# EAGLE board Review_PCD_1.3 (EAGLE 9.6.2)
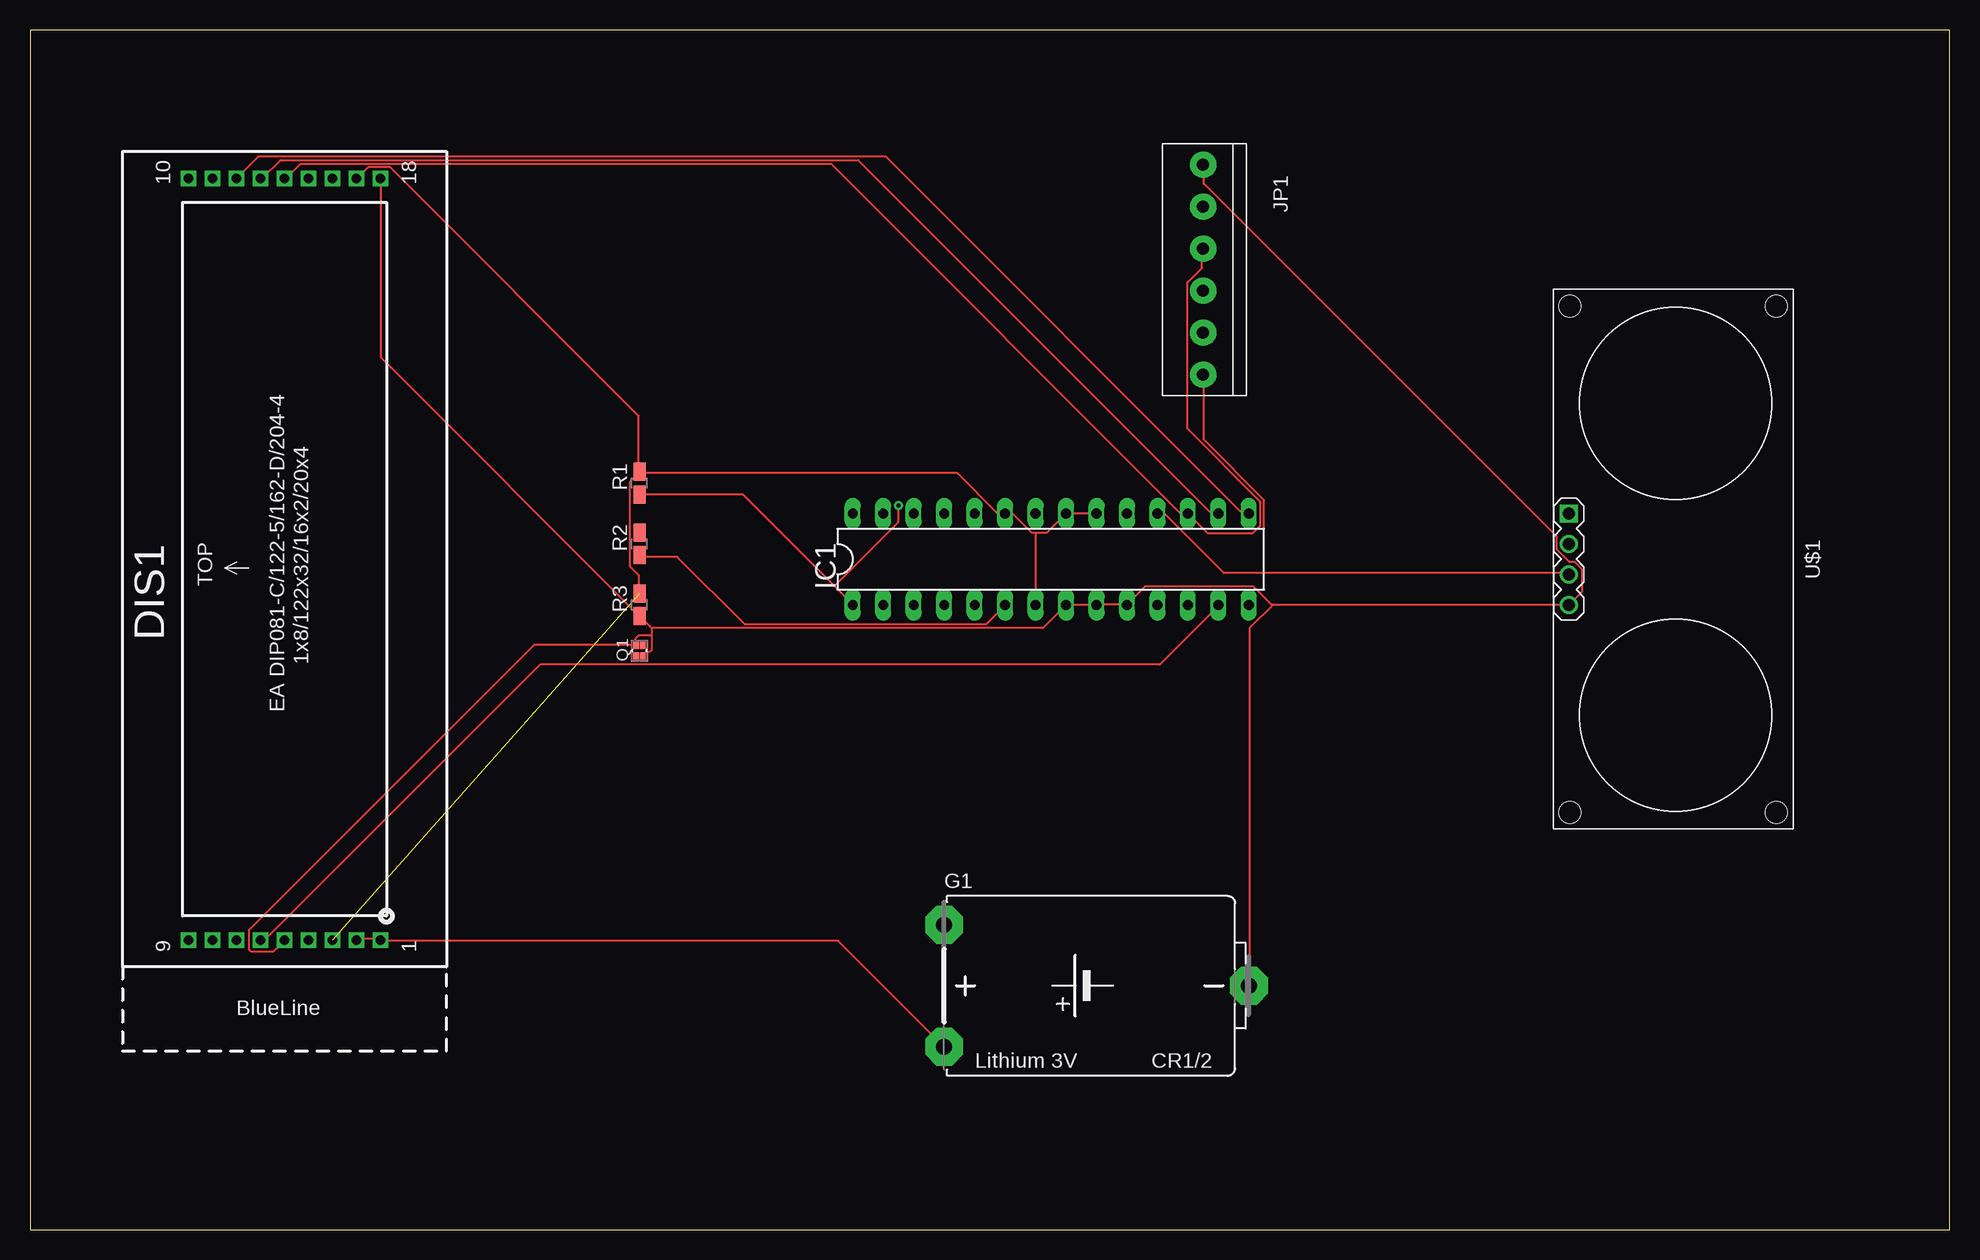
[diagram p0: board, top side]
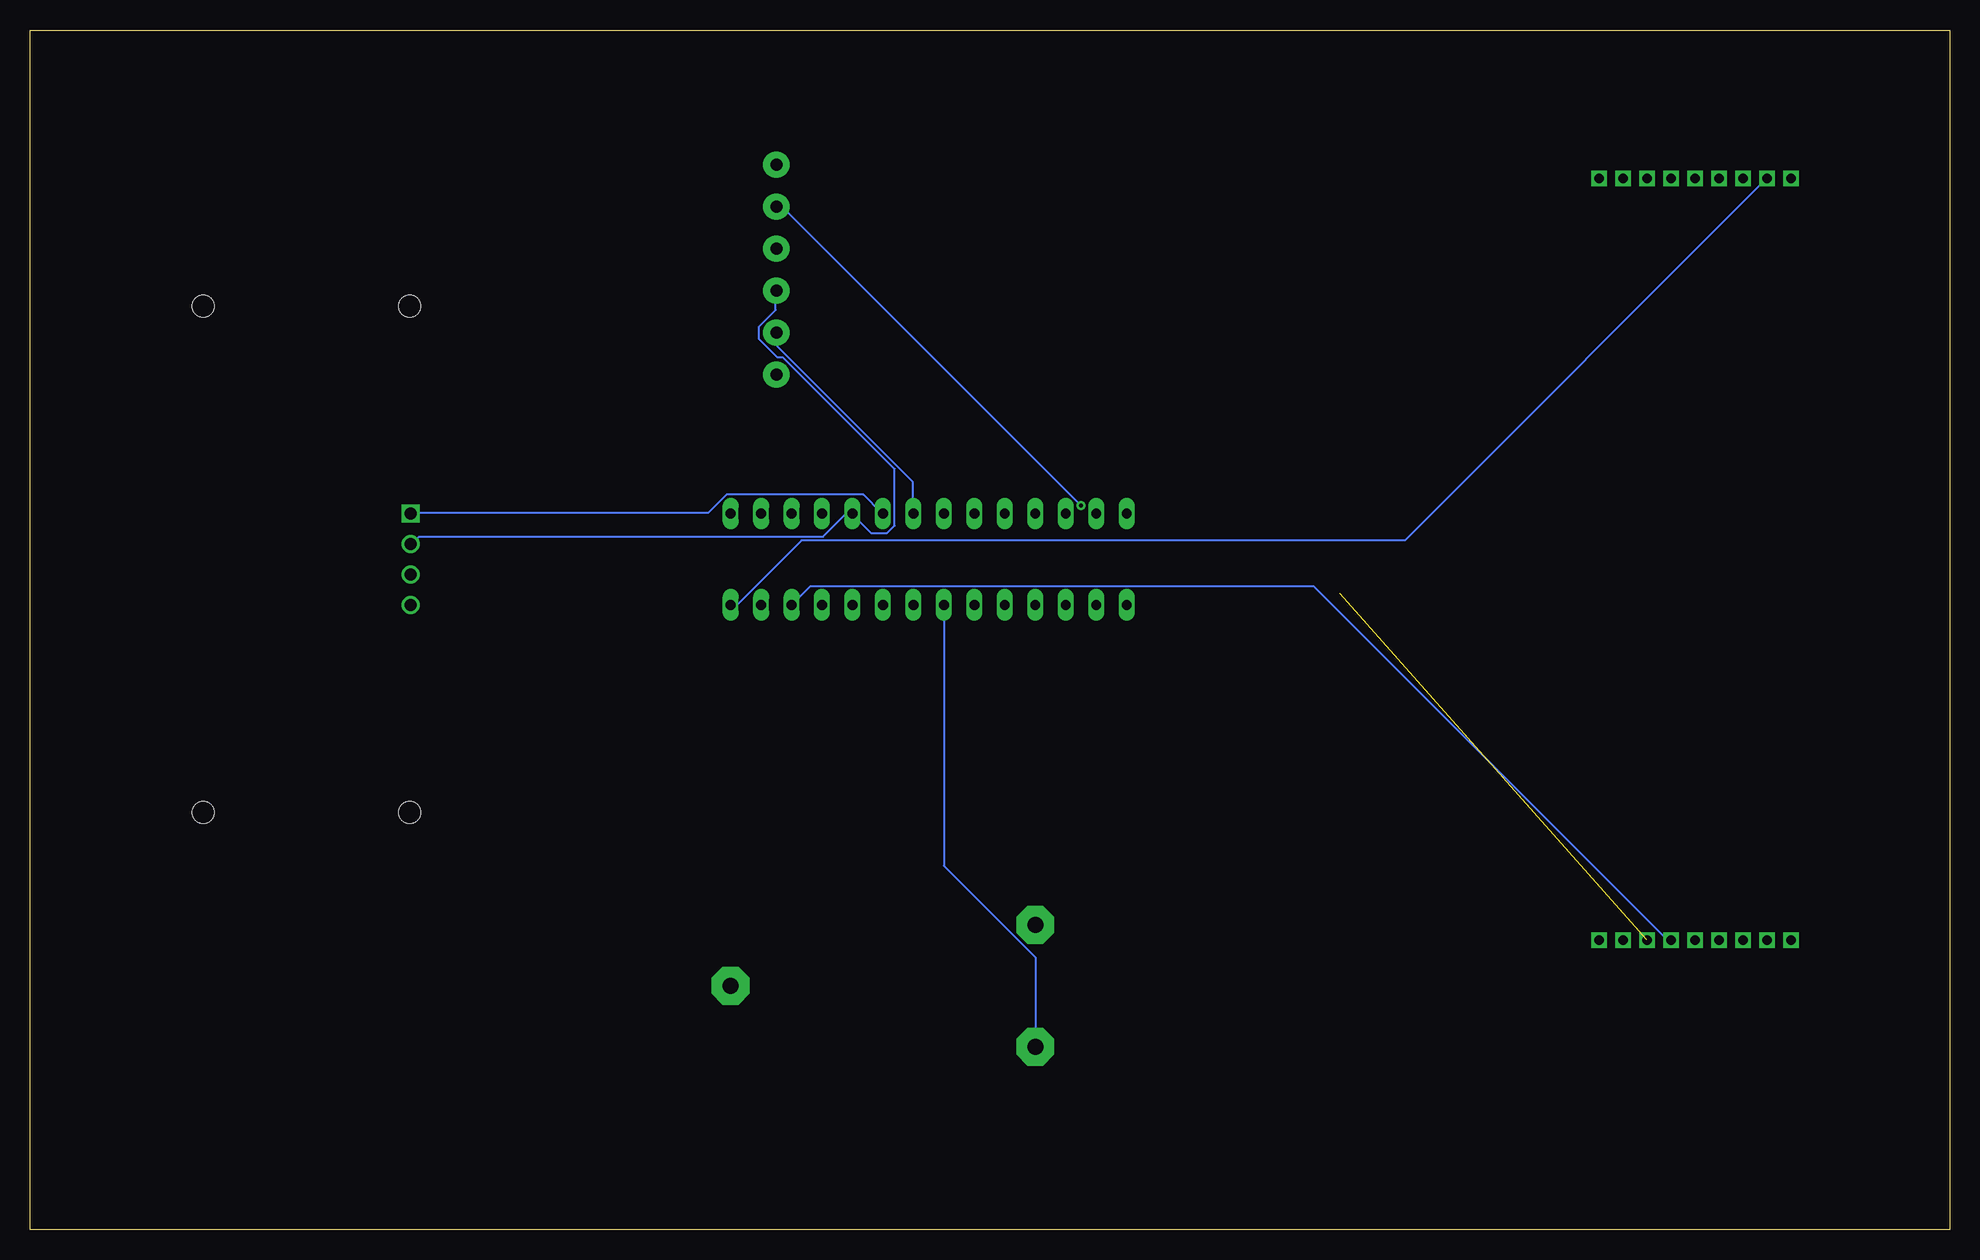
[diagram p1: board, bottom side, seen from below]

Size 160 x 100 mm. Coordinates in mm from the lower left corner, seen from the top.
Outline: 0,0 160,0 160,100 0,100 0,0
Copper layers (1*16): Top 0.035mm / dielectric 0.15mm / Bottom 0.035mm
Design rules "default": minimum track width 6mil, minimum drill 0.35mm, track to track 6mil, track to pad 6mil, pad to pad 6mil, via to via 6mil, smd to smd 6mil, copper to edge 40mil, drill to drill 6mil, minimum pad ring 10mil, minimum via ring 8mil, stop-mask expansion 4mil, vias tented up to drill 0mil, thermal gap 10mil

## Footprints (pad centres in the part's own frame; a part is rotated, then mirrored left to right if it is on the bottom)
EA_DIP = drill 0.813 pad 1.27 square: 1 0,0; 2 0,2; 3 0,4; 4 0,6; 5 0,8; 6 0,10; 7 0,12; 8 0,14; 9 0,16; 10 63.5,16; 11 63.5,14; 12 63.5,12; 13 63.5,10; 14 63.5,8; 15 63.5,6; 16 63.5,4; 17 63.5,2; 18 63.5,0
CR1/2 = drill 1.321 pad 3.15 octagon: + -12.7,-5.08; +@1 -12.7,5.08; - 12.7,0
DIL28-3 = drill 0.813 long: 1 -16.51,-3.81; 2 -13.97,-3.81; 3 -11.43,-3.81; 4 -8.89,-3.81; 5 -6.35,-3.81; 6 -3.81,-3.81; 7 -1.27,-3.81; 8 1.27,-3.81; 9 3.81,-3.81; 10 6.35,-3.81; 11 8.89,-3.81; 12 11.43,-3.81; 13 13.97,-3.81; 14 16.51,-3.81; 15 16.51,3.81; 16 13.97,3.81; 17 11.43,3.81; 18 8.89,3.81; 19 6.35,3.81; 20 3.81,3.81; 21 1.27,3.81; 22 -1.27,3.81; 23 -3.81,3.81; 24 -6.35,3.81; 25 -8.89,3.81; 26 -11.43,3.81; 27 -13.97,3.81; 28 -16.51,3.81
1X06-3.5MM = drill 1 pad 2.184: 1 -8.75,0; 2 -5.25,0; 3 -1.75,0; 4 1.75,0; 5 5.25,0; 6 8.75,0
1.6X1.2 = smd 0.75 x 0.65: 1 -0.525,-0.375; 2 0.525,-0.375; 3 0.525,0.375; 4 -0.525,0.375
R2012W = smd 1.5 x 1: 1 -0.94,0; 2 0.94,0
ULTRASONIC-HC-SR04 = drill 1 square: 1 -3.81,-8.89 | drill 1: 2 -1.27,-8.89; 3 1.27,-8.89; 4 3.81,-8.89 | hole 1.8: -21.1,8.4; -21.1,-8.8; 21.1,-8.8; 21.1,8.4

## Placement (x,y rotation side)
DIS1  EA_DIP  [EA_DIP]  29.21,24.13 90 top
G1  CR1/2  [CR1/2]  88.9,20.32 0 top
IC1  ATMEGA168-20P  [DIL28-3]  85.09,55.88 0 top
JP1  [1X06-3.5MM]  97.79,80.01 90 top
Q1  [1.6X1.2]  50.8,48.26 90 top
R1  [R2012W]  50.8,62.23 90 top
R2  [R2012W]  50.8,57.15 90 top
R3  [R2012W]  50.8,52.07 90 top
U$1  ULTRASONIC-HC-SR04  [ULTRASONIC-HC-SR04]  137.16,55.88 270 top

## Library data of the parts
DIS1 = display-lcd
G1 = battery
IC1 JP1 = adafruit
Q1 = crystal-geyer_V1_0; Q1: 16 MHz
R1 R3 = adafruit; R1: 10 kOhm
R2 = adafruit; R1: 1 kOhm
U$1 = diy-modules

## Nets
0: DIS1.5 DIS1.18 G1.- IC1.8 IC1.9 IC1.10 JP1.6 Q1.1 Q1.3 R3.1 U$1.4
N$1: DIS1.1 DIS1.2 DIS1.17 G1.+ IC1.7 IC1.20 IC1.21 IC1.23 JP1.2 R1.2 U$1.1
N$2: IC1.1 JP1.5 R1.1
N$3: IC1.6 R2.1
N$4: R2.2
N$5: DIS1.4 IC1.12
N$6: DIS1.6 IC1.13
N$7: DIS1.11 IC1.14
N$8: DIS1.12 IC1.15
N$9: DIS1.13 IC1.16
N$11: DIS1.3 R3.2
N$13: IC1.18 JP1.1 U$1.3
N$14: IC1.19 JP1.3 U$1.2
N$15: DIS1.14 IC1.17 JP1.4

## Tracks (layer width: path | path; a pad name or v marks a point on that pad's centre or on a via)
0
  Top 0.152: 91.44,52.12 89,52.12 IC1.9 88.85,52.12 86.41,52.12 IC1.8 84.43,50.14 51.82,50.14 | 103.63,52.12 103.48,52.12 101.96,53.65 92.96,53.65 91.44,52.12 | 103.63,52.12 128.17,52.12 U$1.4 129.39,53.19 129.39,55.02 128.78,55.63 128.32,55.63 127.25,56.69 127.25,57.76 97.84,87.17 97.84,88.7 JP1.6 | 91.44,52.12 IC1.10 | 103.63,52.12 101.65,50.14 101.65,20.42 G1.- | 51.82,50.14 51.82,49.53 | 51.82,49.53 51.82,48.31 51.66,48.16 51.51,48.16 51.21,47.85 Q1.1 | 51.82,50.14 50.9,51.05 R3.1 50.75,51.21 29.26,72.69 29.26,87.63 DIS1.18 | 51.82,49.53 50.75,49.53 50.44,49.23 50.44,48.92 Q1.3 50.29,48.77 42.06,48.77 18.29,24.99 18.29,23.32 18.44,23.16 20.27,23.16 21.18,24.08 DIS1.5
N$1
  Top 0.152: DIS1.2 27.28,24.23 29.11,24.23 DIS1.1 29.26,24.08 67.36,24.08 G1.+ | 83.82,58.06 84.73,58.06 IC1.21 86.41,59.74 88.85,59.74 IC1.20 | 83.82,58.06 83.52,58.06 81.99,59.59 81.38,59.59 IC1.23 81.23,59.74 80.62,59.74 77.27,63.09 50.9,63.09 R1.2 | 83.82,58.06 IC1.7 | 50.75,53.03 50.75,54.56 49.99,55.32 49.99,62.33 50.75,63.09 R1.2 | DIS1.17 27.28,87.63 28.19,88.54 30.02,88.54 50.75,67.82 50.75,63.25 R1.2
  Bottom 0.152: U$1.1 128.17,59.74 103.48,59.74 101.96,61.27 90.53,61.27 89,59.74 IC1.20 | G1.+ 76.2,22.71 83.82,30.33 IC1.7 | JP1.2 97.69,74.68 97.69,73.61 86.41,62.33 86.41,59.74 IC1.21
N$2  (via drill 0.35)
  Top 0.152: 67.06,53.65 68.58,52.12 IC1.1 | 67.06,53.65 59.44,61.27 50.9,61.27 R1.1 | v72.39,60.35 72.39,58.98 67.06,53.65
  Bottom 0.152: v72.39,60.35 97.23,85.19 97.69,85.19 JP1.5
N$3
  Top 0.152: R2.1 50.9,56.08 53.95,56.08 59.59,50.44 79.7,50.44 81.23,51.97 IC1.6
N$5
  Bottom 0.152: IC1.12 94.94,53.65 53.03,53.65 23.62,24.23 23.32,24.23 DIS1.4
N$6
  Top 0.152: DIS1.6 19.36,24.23 19.66,24.23 42.52,47.09 94.18,47.09 99.06,51.97 IC1.13
N$7
  Bottom 0.152: IC1.14 101.5,52.12 101.04,52.12 95.71,57.45 45.41,57.45 15.24,87.63 DIS1.11
N$8
  Top 0.152: IC1.15 101.5,59.74 101.04,59.74 71.32,89.46 19.05,89.46 DIS1.12
N$9
  Top 0.152: IC1.16 99.06,59.74 98.45,59.74 69.04,89.15 20.88,89.15 19.36,87.63 DIS1.13
N$11  (1 unrouted)
N$13
  Top 0.152: 102.87,54.71 128.17,54.71 U$1.3 | 102.87,54.71 99.52,54.71 94.64,59.59 94.03,59.59 IC1.18 | 102.87,54.71 102.87,60.81 97.84,65.84 97.84,71.17 JP1.1
N$14
  Bottom 0.152: 91.44,59.59 92.05,59.59 93.88,57.76 127.56,57.76 128.17,57.15 U$1.2 | 91.44,59.59 89.92,58.06 88.54,58.06 87.94,58.67 87.94,63.4 97.23,72.69 97.69,72.69 99.21,74.22 99.21,75.29 97.84,76.66 97.84,78.18 JP1.3 | 91.44,59.59 IC1.19
N$15
  Top 0.152: DIS1.14 21.34,87.63 22.55,88.85 66.75,88.85 95.86,59.74 96.47,59.74 IC1.17 98.15,58.06 101.96,58.06 102.56,58.67 102.56,60.66 96.47,66.75 96.47,78.94 97.69,80.16 97.69,81.69 JP1.4